# EAGLE board SN74HC165 Shift-In Breakout-Panel-v12 (EAGLE 6.3), part 1 of 2
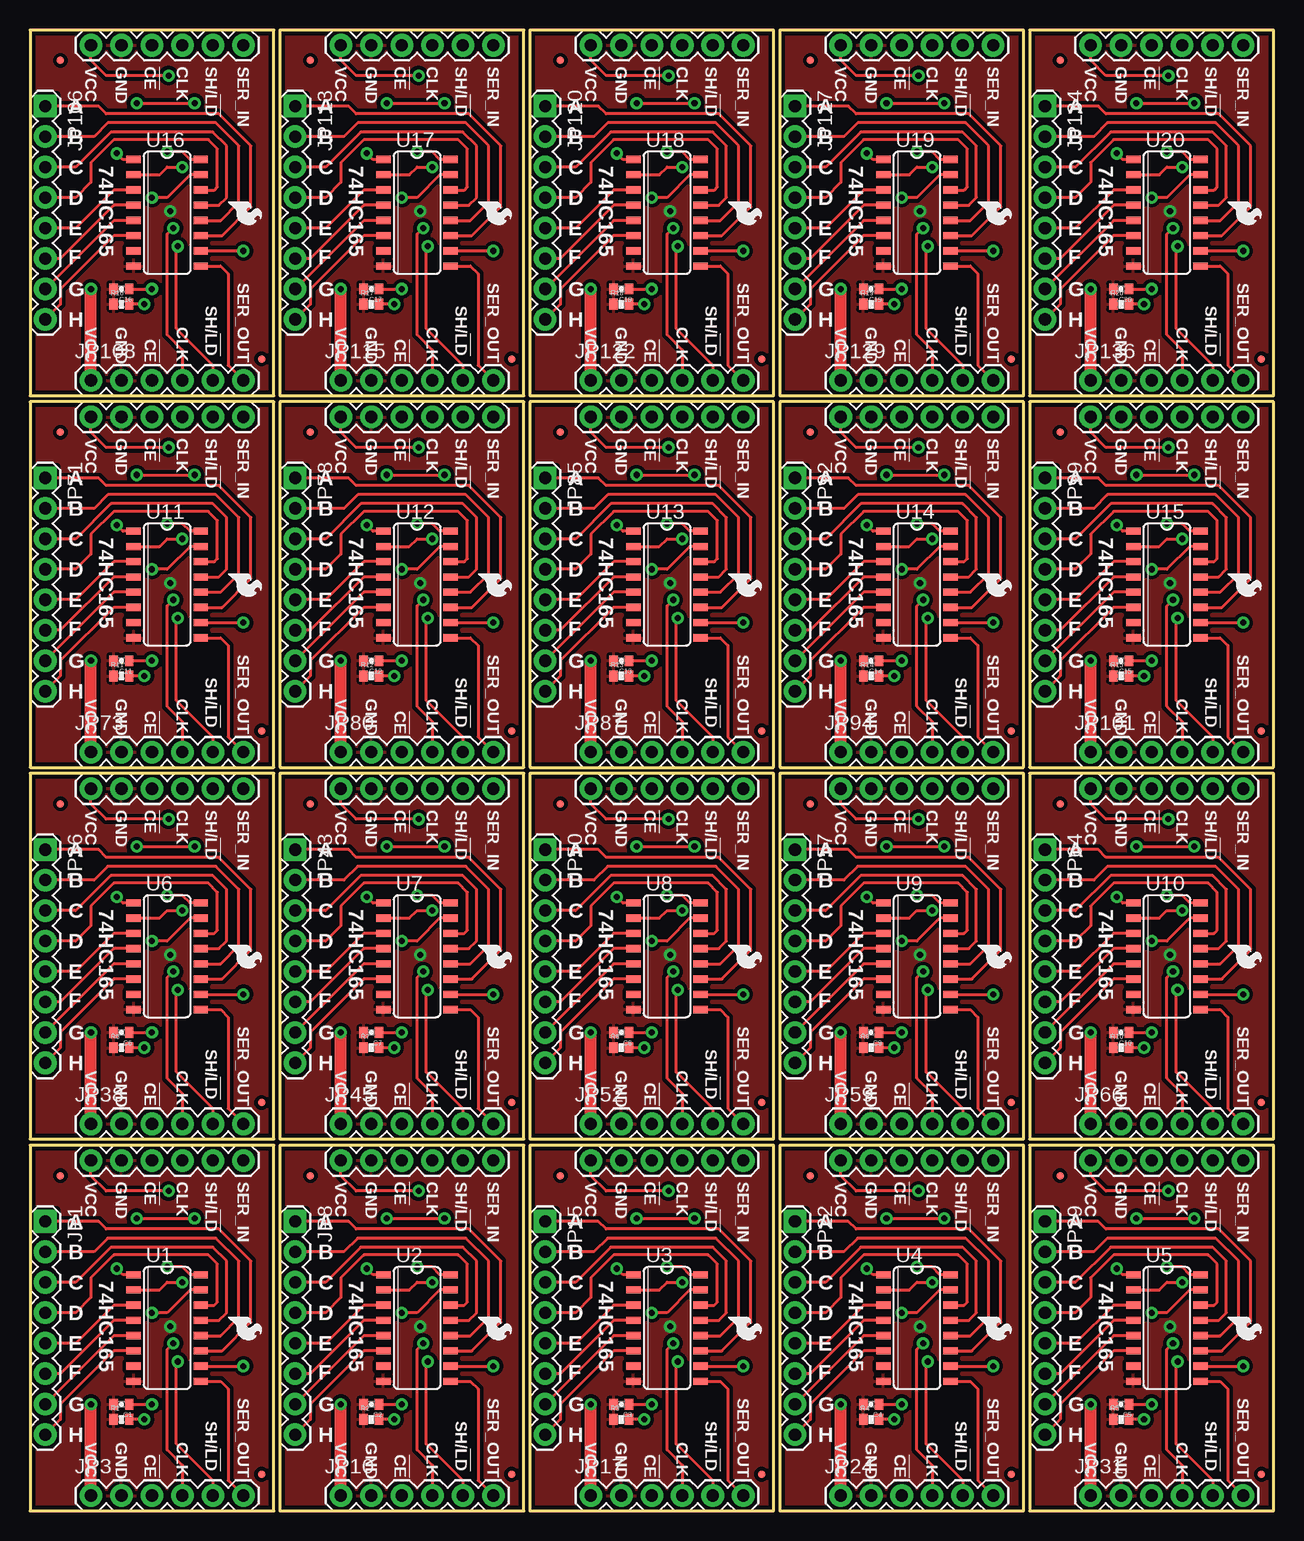
[diagram p0: board, top side]
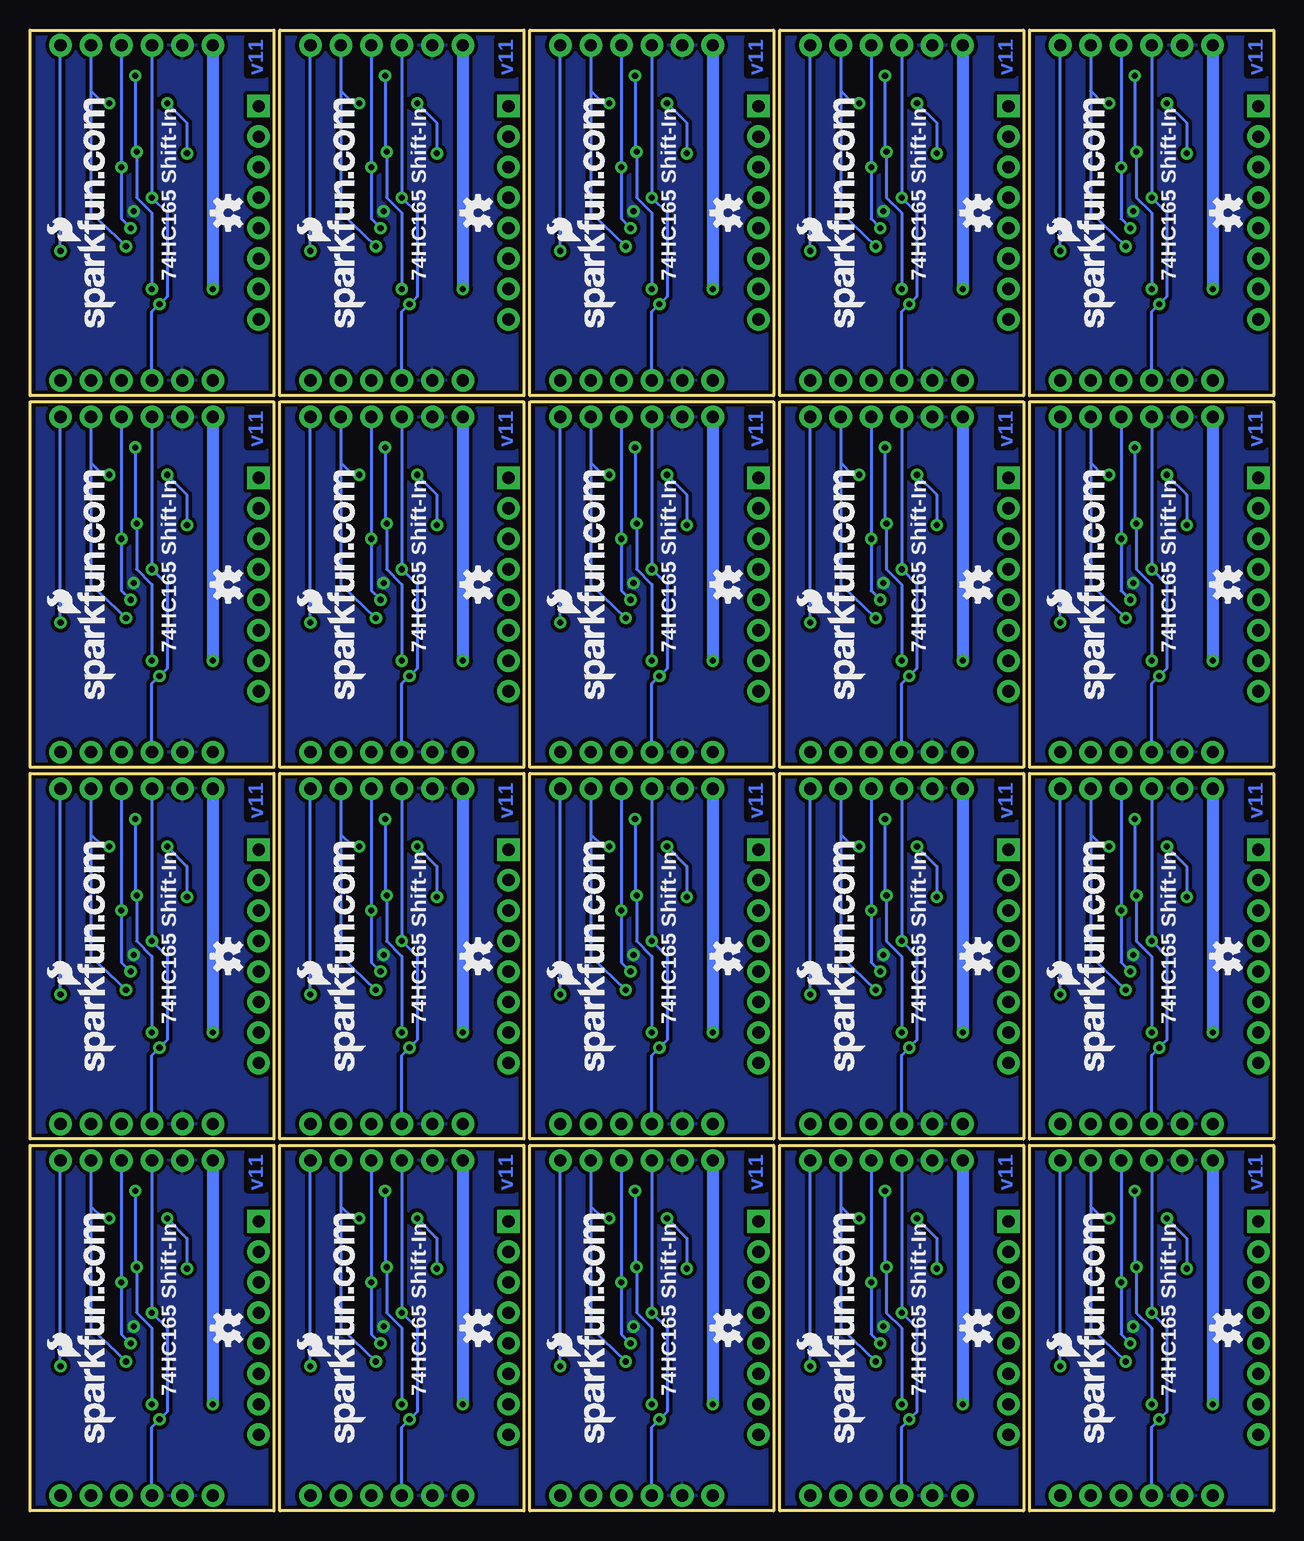
[diagram p1: board, bottom side, seen from below]

Size 103.63 x 123.44 mm. Coordinates in mm from the lower left corner, seen from the top.
Outline: 0,0 20.32,0 20.32,30.48 0,30.48 0,0
Outline: 20.83,0 41.15,0 41.15,30.48 20.83,30.48 20.83,0
Outline: 41.66,0 61.98,0 61.98,30.48 41.66,30.48 41.66,0
Outline: 62.48,0 82.8,0 82.8,30.48 62.48,30.48 62.48,0
Outline: 83.31,0 103.63,0 103.63,30.48 83.31,30.48 83.31,0
Outline: 0,30.99 20.32,30.99 20.32,61.47 0,61.47 0,30.99
Outline: 20.83,30.99 41.15,30.99 41.15,61.47 20.83,61.47 20.83,30.99
Outline: 41.66,30.99 61.98,30.99 61.98,61.47 41.66,61.47 41.66,30.99
Outline: 62.48,30.99 82.8,30.99 82.8,61.47 62.48,61.47 62.48,30.99
Outline: 83.31,30.99 103.63,30.99 103.63,61.47 83.31,61.47 83.31,30.99
Outline: 0,61.98 20.32,61.98 20.32,92.46 0,92.46 0,61.98
Outline: 20.83,61.98 41.15,61.98 41.15,92.46 20.83,92.46 20.83,61.98
Outline: 41.66,61.98 61.98,61.98 61.98,92.46 41.66,92.46 41.66,61.98
Outline: 62.48,61.98 82.8,61.98 82.8,92.46 62.48,92.46 62.48,61.98
Outline: 83.31,61.98 103.63,61.98 103.63,92.46 83.31,92.46 83.31,61.98
Outline: 0,92.96 20.32,92.96 20.32,123.44 0,123.44 0,92.96
Outline: 20.83,92.96 41.15,92.96 41.15,123.44 20.83,123.44 20.83,92.96
Outline: 41.66,92.96 61.98,92.96 61.98,123.44 41.66,123.44 41.66,92.96
Outline: 62.48,92.96 82.8,92.96 82.8,123.44 62.48,123.44 62.48,92.96
Outline: 83.31,92.96 103.63,92.96 103.63,123.44 83.31,123.44 83.31,92.96
Copper layers (1*16): Top 0.035mm / dielectric 1.5mm / Bottom 0.035mm
Design rules "default": minimum track width 8mil, minimum drill 20mil, track to track 8mil, track to pad 8mil, pad to pad 8mil, via to via 8mil, smd to smd 8mil, copper to edge 8mil, drill to drill 8mil, minimum pad ring 12mil, minimum via ring 10mil, stop-mask expansion 4mil, vias tented up to drill 20mil, thermal gap 10mil

## Footprints (pad centres in the part's own frame; a part is rotated, then mirrored left to right if it is on the bottom)
0402-CAP = smd 0.7 x 0.9: 1 -0.65,0; 2 0.65,0
1X08 = drill 1.016 pad 1.88 square: 1 0,0 | drill 1.016 pad 1.88: 2 2.54,0; 3 5.08,0; 4 7.62,0; 5 10.16,0; 6 12.7,0; 7 15.24,0; 8 17.78,0
1X06 = drill 1.016 pad 1.88: 1 0,0; 2 2.54,0; 3 5.08,0; 4 7.62,0; 5 10.16,0; 6 12.7,0
MICRO-FIDUCIAL = smd 0.635 x 0.635: 1 0,0
0402-RES = smd 0.7 x 0.9: 1 -0.65,0; 2 0.65,0
SO16 = smd 0.6 x 1.2: 1 -4.445,-2.8; 2 -3.175,-2.8; 3 -1.905,-2.8; 4 -0.635,-2.8; 5 0.635,-2.8; 6 1.905,-2.8; 7 3.175,-2.8; 8 4.445,-2.8; 9 4.445,2.8; 10 3.175,2.8; 11 1.905,2.8; 12 0.635,2.8; 13 -0.635,2.8; 14 -1.905,2.8; 15 -3.175,2.8; 16 -4.445,2.8

## Placement (x,y rotation side)
C1  .1uF  [0402-CAP]  7.62,8.89 180 top
C2  .1uF  [0402-CAP]  28.45,8.89 180 top
C3  .1uF  [0402-CAP]  49.28,8.89 180 top
C4  .1uF  [0402-CAP]  70.1,8.89 180 top
C5  .1uF  [0402-CAP]  90.93,8.89 180 top
C6  .1uF  [0402-CAP]  7.62,39.88 180 top
C7  .1uF  [0402-CAP]  28.45,39.88 180 top
C8  .1uF  [0402-CAP]  49.28,39.88 180 top
C9  .1uF  [0402-CAP]  70.1,39.88 180 top
C10  .1uF  [0402-CAP]  90.93,39.88 180 top
C11  .1uF  [0402-CAP]  7.62,70.87 180 top
C12  .1uF  [0402-CAP]  28.45,70.87 180 top
C13  .1uF  [0402-CAP]  49.28,70.87 180 top
C14  .1uF  [0402-CAP]  70.1,70.87 180 top
C15  .1uF  [0402-CAP]  90.93,70.87 180 top
C16  .1uF  [0402-CAP]  7.62,101.85 180 top
C17  .1uF  [0402-CAP]  28.45,101.85 180 top
C18  .1uF  [0402-CAP]  49.28,101.85 180 top
C19  .1uF  [0402-CAP]  70.1,101.85 180 top
C20  .1uF  [0402-CAP]  90.93,101.85 180 top
JP1  [1X08]  1.27,24.13 270 top
JP2  [1X06]  5.08,29.21 0 top
JP3  [1X06]  5.08,1.27 0 top
JP4  LOGO-SFESK  [SFE-LOGO-FLAME]  16.51,16.13 270 top
JP5  LOGO-SFENEW  [SFE-NEW-WEBLOGO]  13.21,5.71 90 bottom
JP6  FIDUCIALUFIDUCIAL  [MICRO-FIDUCIAL]  2.54,27.94 0 top
JP7  FIDUCIALUFIDUCIAL  [MICRO-FIDUCIAL]  19.3,3.05 0 top
JP8  [1X08]  22.1,24.13 270 top
JP9  [1X06]  25.91,29.21 0 top
JP10  [1X06]  25.91,1.27 0 top
JP11  LOGO-SFESK  [SFE-LOGO-FLAME]  37.34,16.13 270 top
JP12  LOGO-SFENEW  [SFE-NEW-WEBLOGO]  34.04,5.71 90 bottom
JP13  FIDUCIALUFIDUCIAL  [MICRO-FIDUCIAL]  23.37,27.94 0 top
JP14  FIDUCIALUFIDUCIAL  [MICRO-FIDUCIAL]  40.13,3.05 0 top
JP15  [1X08]  42.93,24.13 270 top
JP16  [1X06]  46.74,29.21 0 top
JP17  [1X06]  46.74,1.27 0 top
JP18  LOGO-SFESK  [SFE-LOGO-FLAME]  58.17,16.13 270 top
JP19  LOGO-SFENEW  [SFE-NEW-WEBLOGO]  54.86,5.71 90 bottom
JP20  FIDUCIALUFIDUCIAL  [MICRO-FIDUCIAL]  44.2,27.94 0 top
JP21  FIDUCIALUFIDUCIAL  [MICRO-FIDUCIAL]  60.96,3.05 0 top
JP22  [1X08]  63.75,24.13 270 top
JP23  [1X06]  67.56,29.21 0 top
JP24  [1X06]  67.56,1.27 0 top
JP25  LOGO-SFESK  [SFE-LOGO-FLAME]  78.99,16.13 270 top
JP26  LOGO-SFENEW  [SFE-NEW-WEBLOGO]  75.69,5.71 90 bottom
JP27  FIDUCIALUFIDUCIAL  [MICRO-FIDUCIAL]  65.02,27.94 0 top
JP28  FIDUCIALUFIDUCIAL  [MICRO-FIDUCIAL]  81.79,3.05 0 top
JP29  [1X08]  84.58,24.13 270 top
JP30  [1X06]  88.39,29.21 0 top
JP31  [1X06]  88.39,1.27 0 top
JP32  LOGO-SFESK  [SFE-LOGO-FLAME]  99.82,16.13 270 top
JP33  LOGO-SFENEW  [SFE-NEW-WEBLOGO]  96.52,5.71 90 bottom
JP34  FIDUCIALUFIDUCIAL  [MICRO-FIDUCIAL]  85.85,27.94 0 top
JP35  FIDUCIALUFIDUCIAL  [MICRO-FIDUCIAL]  102.62,3.05 0 top
JP36  [1X08]  1.27,55.12 270 top
JP37  [1X06]  5.08,60.2 0 top
JP38  [1X06]  5.08,32.26 0 top
JP39  LOGO-SFESK  [SFE-LOGO-FLAME]  16.51,47.12 270 top
JP40  LOGO-SFENEW  [SFE-NEW-WEBLOGO]  13.21,36.7 90 bottom
JP41  FIDUCIALUFIDUCIAL  [MICRO-FIDUCIAL]  2.54,58.93 0 top
JP42  FIDUCIALUFIDUCIAL  [MICRO-FIDUCIAL]  19.3,34.04 0 top
JP43  [1X08]  22.1,55.12 270 top
JP44  [1X06]  25.91,60.2 0 top
JP45  [1X06]  25.91,32.26 0 top
JP46  LOGO-SFESK  [SFE-LOGO-FLAME]  37.34,47.12 270 top
JP47  LOGO-SFENEW  [SFE-NEW-WEBLOGO]  34.04,36.7 90 bottom
JP48  FIDUCIALUFIDUCIAL  [MICRO-FIDUCIAL]  23.37,58.93 0 top
JP49  FIDUCIALUFIDUCIAL  [MICRO-FIDUCIAL]  40.13,34.04 0 top
JP50  [1X08]  42.93,55.12 270 top
JP51  [1X06]  46.74,60.2 0 top
JP52  [1X06]  46.74,32.26 0 top
JP53  LOGO-SFESK  [SFE-LOGO-FLAME]  58.17,47.12 270 top
JP54  LOGO-SFENEW  [SFE-NEW-WEBLOGO]  54.86,36.7 90 bottom
JP55  FIDUCIALUFIDUCIAL  [MICRO-FIDUCIAL]  44.2,58.93 0 top
JP56  FIDUCIALUFIDUCIAL  [MICRO-FIDUCIAL]  60.96,34.04 0 top
JP57  [1X08]  63.75,55.12 270 top
JP58  [1X06]  67.56,60.2 0 top
JP59  [1X06]  67.56,32.26 0 top
JP60  LOGO-SFESK  [SFE-LOGO-FLAME]  78.99,47.12 270 top
JP61  LOGO-SFENEW  [SFE-NEW-WEBLOGO]  75.69,36.7 90 bottom
JP62  FIDUCIALUFIDUCIAL  [MICRO-FIDUCIAL]  65.02,58.93 0 top
JP63  FIDUCIALUFIDUCIAL  [MICRO-FIDUCIAL]  81.79,34.04 0 top
JP64  [1X08]  84.58,55.12 270 top
JP65  [1X06]  88.39,60.2 0 top
JP66  [1X06]  88.39,32.26 0 top
JP67  LOGO-SFESK  [SFE-LOGO-FLAME]  99.82,47.12 270 top
JP68  LOGO-SFENEW  [SFE-NEW-WEBLOGO]  96.52,36.7 90 bottom
JP69  FIDUCIALUFIDUCIAL  [MICRO-FIDUCIAL]  85.85,58.93 0 top
JP70  FIDUCIALUFIDUCIAL  [MICRO-FIDUCIAL]  102.62,34.04 0 top
JP71  [1X08]  1.27,86.11 270 top
JP72  [1X06]  5.08,91.19 0 top
JP73  [1X06]  5.08,63.25 0 top
JP74  LOGO-SFESK  [SFE-LOGO-FLAME]  16.51,78.11 270 top
JP75  LOGO-SFENEW  [SFE-NEW-WEBLOGO]  13.21,67.69 90 bottom
JP76  FIDUCIALUFIDUCIAL  [MICRO-FIDUCIAL]  2.54,89.92 0 top
JP77  FIDUCIALUFIDUCIAL  [MICRO-FIDUCIAL]  19.3,65.02 0 top
JP78  [1X08]  22.1,86.11 270 top
JP79  [1X06]  25.91,91.19 0 top
JP80  [1X06]  25.91,63.25 0 top
JP81  LOGO-SFESK  [SFE-LOGO-FLAME]  37.34,78.11 270 top
JP82  LOGO-SFENEW  [SFE-NEW-WEBLOGO]  34.04,67.69 90 bottom
JP83  FIDUCIALUFIDUCIAL  [MICRO-FIDUCIAL]  23.37,89.92 0 top
JP84  FIDUCIALUFIDUCIAL  [MICRO-FIDUCIAL]  40.13,65.02 0 top
JP85  [1X08]  42.93,86.11 270 top
JP86  [1X06]  46.74,91.19 0 top
JP87  [1X06]  46.74,63.25 0 top
JP88  LOGO-SFESK  [SFE-LOGO-FLAME]  58.17,78.11 270 top
JP89  LOGO-SFENEW  [SFE-NEW-WEBLOGO]  54.86,67.69 90 bottom
JP90  FIDUCIALUFIDUCIAL  [MICRO-FIDUCIAL]  44.2,89.92 0 top
JP91  FIDUCIALUFIDUCIAL  [MICRO-FIDUCIAL]  60.96,65.02 0 top
JP92  [1X08]  63.75,86.11 270 top
JP93  [1X06]  67.56,91.19 0 top
JP94  [1X06]  67.56,63.25 0 top
JP95  LOGO-SFESK  [SFE-LOGO-FLAME]  78.99,78.11 270 top
JP96  LOGO-SFENEW  [SFE-NEW-WEBLOGO]  75.69,67.69 90 bottom
JP97  FIDUCIALUFIDUCIAL  [MICRO-FIDUCIAL]  65.02,89.92 0 top
JP98  FIDUCIALUFIDUCIAL  [MICRO-FIDUCIAL]  81.79,65.02 0 top
JP99  [1X08]  84.58,86.11 270 top
JP100  [1X06]  88.39,91.19 0 top
JP101  [1X06]  88.39,63.25 0 top
JP102  LOGO-SFESK  [SFE-LOGO-FLAME]  99.82,78.11 270 top
JP103  LOGO-SFENEW  [SFE-NEW-WEBLOGO]  96.52,67.69 90 bottom
JP104  FIDUCIALUFIDUCIAL  [MICRO-FIDUCIAL]  85.85,89.92 0 top
JP105  FIDUCIALUFIDUCIAL  [MICRO-FIDUCIAL]  102.62,65.02 0 top
JP106  [1X08]  1.27,117.09 270 top
JP107  [1X06]  5.08,122.17 0 top
JP108  [1X06]  5.08,94.23 0 top
JP109  LOGO-SFESK  [SFE-LOGO-FLAME]  16.51,109.09 270 top
JP110  LOGO-SFENEW  [SFE-NEW-WEBLOGO]  13.21,98.68 90 bottom
JP111  FIDUCIALUFIDUCIAL  [MICRO-FIDUCIAL]  2.54,120.9 0 top
JP112  FIDUCIALUFIDUCIAL  [MICRO-FIDUCIAL]  19.3,96.01 0 top
JP113  [1X08]  22.1,117.09 270 top
JP114  [1X06]  25.91,122.17 0 top
JP115  [1X06]  25.91,94.23 0 top
JP116  LOGO-SFESK  [SFE-LOGO-FLAME]  37.34,109.09 270 top
JP117  LOGO-SFENEW  [SFE-NEW-WEBLOGO]  34.04,98.68 90 bottom
JP118  FIDUCIALUFIDUCIAL  [MICRO-FIDUCIAL]  23.37,120.9 0 top
JP119  FIDUCIALUFIDUCIAL  [MICRO-FIDUCIAL]  40.13,96.01 0 top
JP120  [1X08]  42.93,117.09 270 top
JP121  [1X06]  46.74,122.17 0 top
JP122  [1X06]  46.74,94.23 0 top
JP123  LOGO-SFESK  [SFE-LOGO-FLAME]  58.17,109.09 270 top
JP124  LOGO-SFENEW  [SFE-NEW-WEBLOGO]  54.86,98.68 90 bottom
JP125  FIDUCIALUFIDUCIAL  [MICRO-FIDUCIAL]  44.2,120.9 0 top
JP126  FIDUCIALUFIDUCIAL  [MICRO-FIDUCIAL]  60.96,96.01 0 top
JP127  [1X08]  63.75,117.09 270 top
JP128  [1X06]  67.56,122.17 0 top
JP129  [1X06]  67.56,94.23 0 top
JP130  LOGO-SFESK  [SFE-LOGO-FLAME]  78.99,109.09 270 top
JP131  LOGO-SFENEW  [SFE-NEW-WEBLOGO]  75.69,98.68 90 bottom
JP132  FIDUCIALUFIDUCIAL  [MICRO-FIDUCIAL]  65.02,120.9 0 top
JP133  FIDUCIALUFIDUCIAL  [MICRO-FIDUCIAL]  81.79,96.01 0 top
JP134  [1X08]  84.58,117.09 270 top
JP135  [1X06]  88.39,122.17 0 top
JP136  [1X06]  88.39,94.23 0 top
JP137  LOGO-SFESK  [SFE-LOGO-FLAME]  99.82,109.09 270 top
JP138  LOGO-SFENEW  [SFE-NEW-WEBLOGO]  96.52,98.68 90 bottom
JP139  FIDUCIALUFIDUCIAL  [MICRO-FIDUCIAL]  85.85,120.9 0 top
JP140  FIDUCIALUFIDUCIAL  [MICRO-FIDUCIAL]  102.62,96.01 0 top
R1  10k  [0402-RES]  7.62,7.62 0 top
R2  10k  [0402-RES]  28.45,7.62 0 top
R3  10k  [0402-RES]  49.28,7.62 0 top
R4  10k  [0402-RES]  70.1,7.62 0 top
R5  10k  [0402-RES]  90.93,7.62 0 top
R6  10k  [0402-RES]  7.62,38.61 0 top
R7  10k  [0402-RES]  28.45,38.61 0 top
R8  10k  [0402-RES]  49.28,38.61 0 top
R9  10k  [0402-RES]  70.1,38.61 0 top
R10  10k  [0402-RES]  90.93,38.61 0 top
R11  10k  [0402-RES]  7.62,69.6 0 top
R12  10k  [0402-RES]  28.45,69.6 0 top
R13  10k  [0402-RES]  49.28,69.6 0 top
R14  10k  [0402-RES]  70.1,69.6 0 top
R15  10k  [0402-RES]  90.93,69.6 0 top
R16  10k  [0402-RES]  7.62,100.58 0 top
R17  10k  [0402-RES]  28.45,100.58 0 top
R18  10k  [0402-RES]  49.28,100.58 0 top
R19  10k  [0402-RES]  70.1,100.58 0 top
R20  10k  [0402-RES]  90.93,100.58 0 top
U1  74HC165D  [SO16]  11.43,15.24 270 top
U2  74HC165D  [SO16]  32.26,15.24 270 top
U3  74HC165D  [SO16]  53.09,15.24 270 top
U4  74HC165D  [SO16]  73.91,15.24 270 top
U5  74HC165D  [SO16]  94.74,15.24 270 top
U6  74HC165D  [SO16]  11.43,46.23 270 top
U7  74HC165D  [SO16]  32.26,46.23 270 top
U8  74HC165D  [SO16]  53.09,46.23 270 top
U9  74HC165D  [SO16]  73.91,46.23 270 top
U10  74HC165D  [SO16]  94.74,46.23 270 top
U11  74HC165D  [SO16]  11.43,77.22 270 top
U12  74HC165D  [SO16]  32.26,77.22 270 top
U13  74HC165D  [SO16]  53.09,77.22 270 top
U14  74HC165D  [SO16]  73.91,77.22 270 top
U15  74HC165D  [SO16]  94.74,77.22 270 top
U16  74HC165D  [SO16]  11.43,108.2 270 top
U17  74HC165D  [SO16]  32.26,108.2 270 top
U18  74HC165D  [SO16]  53.09,108.2 270 top
U19  74HC165D  [SO16]  73.91,108.2 270 top
U20  74HC165D  [SO16]  94.74,108.2 270 top
U$1  OSHW-LOGOS  [OSHW-LOGO-S]  3.81,15.24 90 bottom
U$2  OSHW-LOGOS  [OSHW-LOGO-S]  24.64,15.24 90 bottom
U$3  OSHW-LOGOS  [OSHW-LOGO-S]  45.47,15.24 90 bottom
U$4  OSHW-LOGOS  [OSHW-LOGO-S]  66.29,15.24 90 bottom
U$5  OSHW-LOGOS  [OSHW-LOGO-S]  87.12,15.24 90 bottom
U$6  OSHW-LOGOS  [OSHW-LOGO-S]  3.81,46.23 90 bottom
U$7  OSHW-LOGOS  [OSHW-LOGO-S]  24.64,46.23 90 bottom
U$8  OSHW-LOGOS  [OSHW-LOGO-S]  45.47,46.23 90 bottom
U$9  OSHW-LOGOS  [OSHW-LOGO-S]  66.29,46.23 90 bottom
U$10  OSHW-LOGOS  [OSHW-LOGO-S]  87.12,46.23 90 bottom
U$11  OSHW-LOGOS  [OSHW-LOGO-S]  3.81,77.22 90 bottom
U$12  OSHW-LOGOS  [OSHW-LOGO-S]  24.64,77.22 90 bottom
U$13  OSHW-LOGOS  [OSHW-LOGO-S]  45.47,77.22 90 bottom
U$14  OSHW-LOGOS  [OSHW-LOGO-S]  66.29,77.22 90 bottom
U$15  OSHW-LOGOS  [OSHW-LOGO-S]  87.12,77.22 90 bottom
U$16  OSHW-LOGOS  [OSHW-LOGO-S]  3.81,108.2 90 bottom
U$17  OSHW-LOGOS  [OSHW-LOGO-S]  24.64,108.2 90 bottom
U$18  OSHW-LOGOS  [OSHW-LOGO-S]  45.47,108.2 90 bottom
U$19  OSHW-LOGOS  [OSHW-LOGO-S]  66.29,108.2 90 bottom
U$20  OSHW-LOGOS  [OSHW-LOGO-S]  87.12,108.2 90 bottom

## Library data of the parts
C1-C20 R1-R20 = SparkFun-Passives
JP1-JP3 JP8-JP10 JP15-JP17 JP22-JP24 JP29-JP31 JP36-JP38 JP43-JP45 JP50-JP52 JP57-JP59 JP64-JP66 JP71-JP73 JP78-JP80 JP85-JP87 JP92-JP94 JP99-JP101 JP106-JP108 JP113-JP115 JP120-JP122 JP127-JP129 JP134-JP136 = SparkFun-Connectors
JP4 JP5 JP11 JP12 JP18 JP19 JP25 JP26 JP32 JP33 JP39 JP40 JP46 JP47 JP53 JP54 JP60 JP61 JP67 JP68 JP74 JP75 JP81 JP82 JP88 JP89 JP95 JP96 JP102 JP103 JP109 JP110 JP116 JP117 JP123 JP124 JP130 JP131 JP137 JP138 U$1-U$20 = SparkFun-Aesthetics
JP6 JP7 JP13 JP14 JP20 JP21 JP27 JP28 JP34 JP35 JP41 JP42 JP48 JP49 JP55 JP56 JP62 JP63 JP69 JP70 JP76 JP77 JP83 JP84 JP90 JP91 JP97 JP98 JP104 JP105 JP111 JP112 JP118 JP119 JP125 JP126 JP132 JP133 JP139 JP140 = SparkFun
U1-U20 = SparkFun-DigitalIC

## Nets
!CLK_ENABLE: JP2.3 JP3.3 R1.2 U1.15
!CLK_ENABLE1: JP9.3 JP10.3 R2.2 U2.15
!CLK_ENABLE2: JP16.3 JP17.3 R3.2 U3.15
!CLK_ENABLE3: JP23.3 JP24.3 R4.2 U4.15
!CLK_ENABLE4: JP30.3 JP31.3 R5.2 U5.15
!CLK_ENABLE5: JP37.3 JP38.3 R6.2 U6.15
!CLK_ENABLE6: JP44.3 JP45.3 R7.2 U7.15
!CLK_ENABLE7: JP51.3 JP52.3 R8.2 U8.15
!CLK_ENABLE8: JP58.3 JP59.3 R9.2 U9.15
!CLK_ENABLE9: JP65.3 JP66.3 R10.2 U10.15
!CLK_ENABLE10: JP72.3 JP73.3 R11.2 U11.15
!CLK_ENABLE11: JP79.3 JP80.3 R12.2 U12.15
!CLK_ENABLE12: JP86.3 JP87.3 R13.2 U13.15
!CLK_ENABLE13: JP93.3 JP94.3 R14.2 U14.15
!CLK_ENABLE14: JP100.3 JP101.3 R15.2 U15.15
!CLK_ENABLE15: JP107.3 JP108.3 R16.2 U16.15
!CLK_ENABLE16: JP114.3 JP115.3 R17.2 U17.15
!CLK_ENABLE17: JP121.3 JP122.3 R18.2 U18.15
!CLK_ENABLE18: JP128.3 JP129.3 R19.2 U19.15
!CLK_ENABLE19: JP135.3 JP136.3 R20.2 U20.15
A: JP1.1 U1.11
A1: JP8.1 U2.11
A2: JP15.1 U3.11
A3: JP22.1 U4.11
A4: JP29.1 U5.11
A5: JP36.1 U6.11
A6: JP43.1 U7.11
A7: JP50.1 U8.11
A8: JP57.1 U9.11
A9: JP64.1 U10.11
A10: JP71.1 U11.11
A11: JP78.1 U12.11
A12: JP85.1 U13.11
A13: JP92.1 U14.11
A14: JP99.1 U15.11
A15: JP106.1 U16.11
A16: JP113.1 U17.11
A17: JP120.1 U18.11
A18: JP127.1 U19.11
A19: JP134.1 U20.11
B: JP1.2 U1.12
B1: JP8.2 U2.12
B2: JP15.2 U3.12
B3: JP22.2 U4.12
B4: JP29.2 U5.12
B5: JP36.2 U6.12
B6: JP43.2 U7.12
B7: JP50.2 U8.12
B8: JP57.2 U9.12
B9: JP64.2 U10.12
B10: JP71.2 U11.12
B11: JP78.2 U12.12
B12: JP85.2 U13.12
B13: JP92.2 U14.12
B14: JP99.2 U15.12
B15: JP106.2 U16.12
B16: JP113.2 U17.12
B17: JP120.2 U18.12
B18: JP127.2 U19.12
B19: JP134.2 U20.12
C: JP1.3 U1.13
C1: JP8.3 U2.13
C2: JP15.3 U3.13
C3: JP22.3 U4.13
C4: JP29.3 U5.13
C5: JP36.3 U6.13
C6: JP43.3 U7.13
C7: JP50.3 U8.13
C8: JP57.3 U9.13
C9: JP64.3 U10.13
C10: JP71.3 U11.13
C11: JP78.3 U12.13
C12: JP85.3 U13.13
C13: JP92.3 U14.13
C14: JP99.3 U15.13
C15: JP106.3 U16.13
C16: JP113.3 U17.13
C17: JP120.3 U18.13
C18: JP127.3 U19.13
C19: JP134.3 U20.13
CLK: JP2.4 JP3.4 U1.2
CLK1: JP9.4 JP10.4 U2.2
CLK2: JP16.4 JP17.4 U3.2
CLK3: JP23.4 JP24.4 U4.2
CLK4: JP30.4 JP31.4 U5.2
CLK5: JP37.4 JP38.4 U6.2
CLK6: JP44.4 JP45.4 U7.2
CLK7: JP51.4 JP52.4 U8.2
CLK8: JP58.4 JP59.4 U9.2
CLK9: JP65.4 JP66.4 U10.2
CLK10: JP72.4 JP73.4 U11.2
CLK11: JP79.4 JP80.4 U12.2
CLK12: JP86.4 JP87.4 U13.2
CLK13: JP93.4 JP94.4 U14.2
CLK14: JP100.4 JP101.4 U15.2
CLK15: JP107.4 JP108.4 U16.2
CLK16: JP114.4 JP115.4 U17.2
CLK17: JP121.4 JP122.4 U18.2
CLK18: JP128.4 JP129.4 U19.2
CLK19: JP135.4 JP136.4 U20.2
D: JP1.4 U1.14
D1: JP8.4 U2.14
D2: JP15.4 U3.14
D3: JP22.4 U4.14
D4: JP29.4 U5.14
D5: JP36.4 U6.14
D6: JP43.4 U7.14
D7: JP50.4 U8.14
D8: JP57.4 U9.14
D9: JP64.4 U10.14
D10: JP71.4 U11.14
D11: JP78.4 U12.14
D12: JP85.4 U13.14
D13: JP92.4 U14.14
D14: JP99.4 U15.14
D15: JP106.4 U16.14
D16: JP113.4 U17.14
D17: JP120.4 U18.14
D18: JP127.4 U19.14
D19: JP134.4 U20.14
E: JP1.5 U1.3
E1: JP8.5 U2.3
E2: JP15.5 U3.3
E3: JP22.5 U4.3
E4: JP29.5 U5.3
E5: JP36.5 U6.3
E6: JP43.5 U7.3
E7: JP50.5 U8.3
E8: JP57.5 U9.3
E9: JP64.5 U10.3
E10: JP71.5 U11.3
E11: JP78.5 U12.3
E12: JP85.5 U13.3
E13: JP92.5 U14.3
E14: JP99.5 U15.3
E15: JP106.5 U16.3
E16: JP113.5 U17.3
E17: JP120.5 U18.3
E18: JP127.5 U19.3
E19: JP134.5 U20.3
F: JP1.6 U1.4
F1: JP8.6 U2.4
F2: JP15.6 U3.4
F3: JP22.6 U4.4
F4: JP29.6 U5.4
F5: JP36.6 U6.4
F6: JP43.6 U7.4
F7: JP50.6 U8.4
F8: JP57.6 U9.4
F9: JP64.6 U10.4
F10: JP71.6 U11.4
F11: JP78.6 U12.4
F12: JP85.6 U13.4
F13: JP92.6 U14.4
F14: JP99.6 U15.4
F15: JP106.6 U16.4
F16: JP113.6 U17.4
F17: JP120.6 U18.4
F18: JP127.6 U19.4
F19: JP134.6 U20.4
G: JP1.7 U1.5
G1: JP8.7 U2.5
G2: JP15.7 U3.5
G3: JP22.7 U4.5
G4: JP29.7 U5.5
G5: JP36.7 U6.5
G6: JP43.7 U7.5
G7: JP50.7 U8.5
G8: JP57.7 U9.5
G9: JP64.7 U10.5
G10: JP71.7 U11.5
G11: JP78.7 U12.5
G12: JP85.7 U13.5
G13: JP92.7 U14.5
G14: JP99.7 U15.5
G15: JP106.7 U16.5
G16: JP113.7 U17.5
G17: JP120.7 U18.5
G18: JP127.7 U19.5
G19: JP134.7 U20.5
GND: C1.2 JP2.2 JP3.2 R1.1 U1.8
GND1: C2.2 JP9.2 JP10.2 R2.1 U2.8
GND2: C3.2 JP16.2 JP17.2 R3.1 U3.8
GND3: C4.2 JP23.2 JP24.2 R4.1 U4.8
GND4: C5.2 JP30.2 JP31.2 R5.1 U5.8
GND5: C6.2 JP37.2 JP38.2 R6.1 U6.8
GND6: C7.2 JP44.2 JP45.2 R7.1 U7.8
GND7: C8.2 JP51.2 JP52.2 R8.1 U8.8
GND8: C9.2 JP58.2 JP59.2 R9.1 U9.8
GND9: C10.2 JP65.2 JP66.2 R10.1 U10.8
GND10: C11.2 JP72.2 JP73.2 R11.1 U11.8
GND11: C12.2 JP79.2 JP80.2 R12.1 U12.8
GND12: C13.2 JP86.2 JP87.2 R13.1 U13.8
GND13: C14.2 JP93.2 JP94.2 R14.1 U14.8
GND14: C15.2 JP100.2 JP101.2 R15.1 U15.8
GND15: C16.2 JP107.2 JP108.2 R16.1 U16.8
GND16: C17.2 JP114.2 JP115.2 R17.1 U17.8
GND17: C18.2 JP121.2 JP122.2 R18.1 U18.8
GND18: C19.2 JP128.2 JP129.2 R19.1 U19.8
GND19: C20.2 JP135.2 JP136.2 R20.1 U20.8
H: JP1.8 U1.6
H1: JP8.8 U2.6
H2: JP15.8 U3.6
H3: JP22.8 U4.6
H4: JP29.8 U5.6
H5: JP36.8 U6.6
H6: JP43.8 U7.6
H7: JP50.8 U8.6
H8: JP57.8 U9.6
H9: JP64.8 U10.6
H10: JP71.8 U11.6
H11: JP78.8 U12.6
H12: JP85.8 U13.6
H13: JP92.8 U14.6
H14: JP99.8 U15.6
H15: JP106.8 U16.6
H16: JP113.8 U17.6
H17: JP120.8 U18.6
H18: JP127.8 U19.6
H19: JP134.8 U20.6
SERIAL_IN: JP2.6 U1.10
SERIAL_IN1: JP9.6 U2.10
SERIAL_IN2: JP16.6 U3.10
SERIAL_IN3: JP23.6 U4.10
SERIAL_IN4: JP30.6 U5.10
SERIAL_IN5: JP37.6 U6.10
SERIAL_IN6: JP44.6 U7.10
SERIAL_IN7: JP51.6 U8.10
SERIAL_IN8: JP58.6 U9.10
SERIAL_IN9: JP65.6 U10.10
SERIAL_IN10: JP72.6 U11.10
SERIAL_IN11: JP79.6 U12.10
SERIAL_IN12: JP86.6 U13.10
SERIAL_IN13: JP93.6 U14.10
SERIAL_IN14: JP100.6 U15.10
SERIAL_IN15: JP107.6 U16.10
SERIAL_IN16: JP114.6 U17.10
SERIAL_IN17: JP121.6 U18.10
SERIAL_IN18: JP128.6 U19.10
SERIAL_IN19: JP135.6 U20.10
SERIAL_OUT: JP3.6 U1.9
SERIAL_OUT1: JP10.6 U2.9
SERIAL_OUT2: JP17.6 U3.9
SERIAL_OUT3: JP24.6 U4.9
SERIAL_OUT4: JP31.6 U5.9
SERIAL_OUT5: JP38.6 U6.9
SERIAL_OUT6: JP45.6 U7.9
SERIAL_OUT7: JP52.6 U8.9
SERIAL_OUT8: JP59.6 U9.9
SERIAL_OUT9: JP66.6 U10.9
SERIAL_OUT10: JP73.6 U11.9
SERIAL_OUT11: JP80.6 U12.9
SERIAL_OUT12: JP87.6 U13.9
SERIAL_OUT13: JP94.6 U14.9
SERIAL_OUT14: JP101.6 U15.9
SERIAL_OUT15: JP108.6 U16.9
SERIAL_OUT16: JP115.6 U17.9
SERIAL_OUT17: JP122.6 U18.9
SERIAL_OUT18: JP129.6 U19.9
SERIAL_OUT19: JP136.6 U20.9
SHIFT/!LOAD: JP2.5 JP3.5 U1.1
SHIFT/!LOAD1: JP9.5 JP10.5 U2.1
SHIFT/!LOAD2: JP16.5 JP17.5 U3.1
SHIFT/!LOAD3: JP23.5 JP24.5 U4.1
SHIFT/!LOAD4: JP30.5 JP31.5 U5.1
SHIFT/!LOAD5: JP37.5 JP38.5 U6.1
SHIFT/!LOAD6: JP44.5 JP45.5 U7.1
SHIFT/!LOAD7: JP51.5 JP52.5 U8.1
SHIFT/!LOAD8: JP58.5 JP59.5 U9.1
SHIFT/!LOAD9: JP65.5 JP66.5 U10.1
SHIFT/!LOAD10: JP72.5 JP73.5 U11.1
SHIFT/!LOAD11: JP79.5 JP80.5 U12.1
SHIFT/!LOAD12: JP86.5 JP87.5 U13.1
SHIFT/!LOAD13: JP93.5 JP94.5 U14.1
SHIFT/!LOAD14: JP100.5 JP101.5 U15.1
SHIFT/!LOAD15: JP107.5 JP108.5 U16.1
SHIFT/!LOAD16: JP114.5 JP115.5 U17.1
SHIFT/!LOAD17: JP121.5 JP122.5 U18.1
SHIFT/!LOAD18: JP128.5 JP129.5 U19.1
SHIFT/!LOAD19: JP135.5 JP136.5 U20.1
VCC: C1.1 JP2.1 JP3.1 U1.16
VCC1: C2.1 JP9.1 JP10.1 U2.16
VCC2: C3.1 JP16.1 JP17.1 U3.16
VCC3: C4.1 JP23.1 JP24.1 U4.16
VCC4: C5.1 JP30.1 JP31.1 U5.16
VCC5: C6.1 JP37.1 JP38.1 U6.16
VCC6: C7.1 JP44.1 JP45.1 U7.16
VCC7: C8.1 JP51.1 JP52.1 U8.16
VCC8: C9.1 JP58.1 JP59.1 U9.16
VCC9: C10.1 JP65.1 JP66.1 U10.16
VCC10: C11.1 JP72.1 JP73.1 U11.16
VCC11: C12.1 JP79.1 JP80.1 U12.16
VCC12: C13.1 JP86.1 JP87.1 U13.16
VCC13: C14.1 JP93.1 JP94.1 U14.16
VCC14: C15.1 JP100.1 JP101.1 U15.16
VCC15: C16.1 JP107.1 JP108.1 U16.16
VCC16: C17.1 JP114.1 JP115.1 U17.16
VCC17: C18.1 JP121.1 JP122.1 U18.16
VCC18: C19.1 JP128.1 JP129.1 U19.16
VCC19: C20.1 JP135.1 JP136.1 U20.16